# Altium PCB PCB.PcbDoc
Units mil, origin at the board's own origin, x right, y up, seen from the top; angles counter-clockwise.
Board outline 3346.46 x 2962.27 mil, 2 copper layers (Top Layer, Bottom Layer); 3 components, 19 nets, 54 pads, 10 vias.
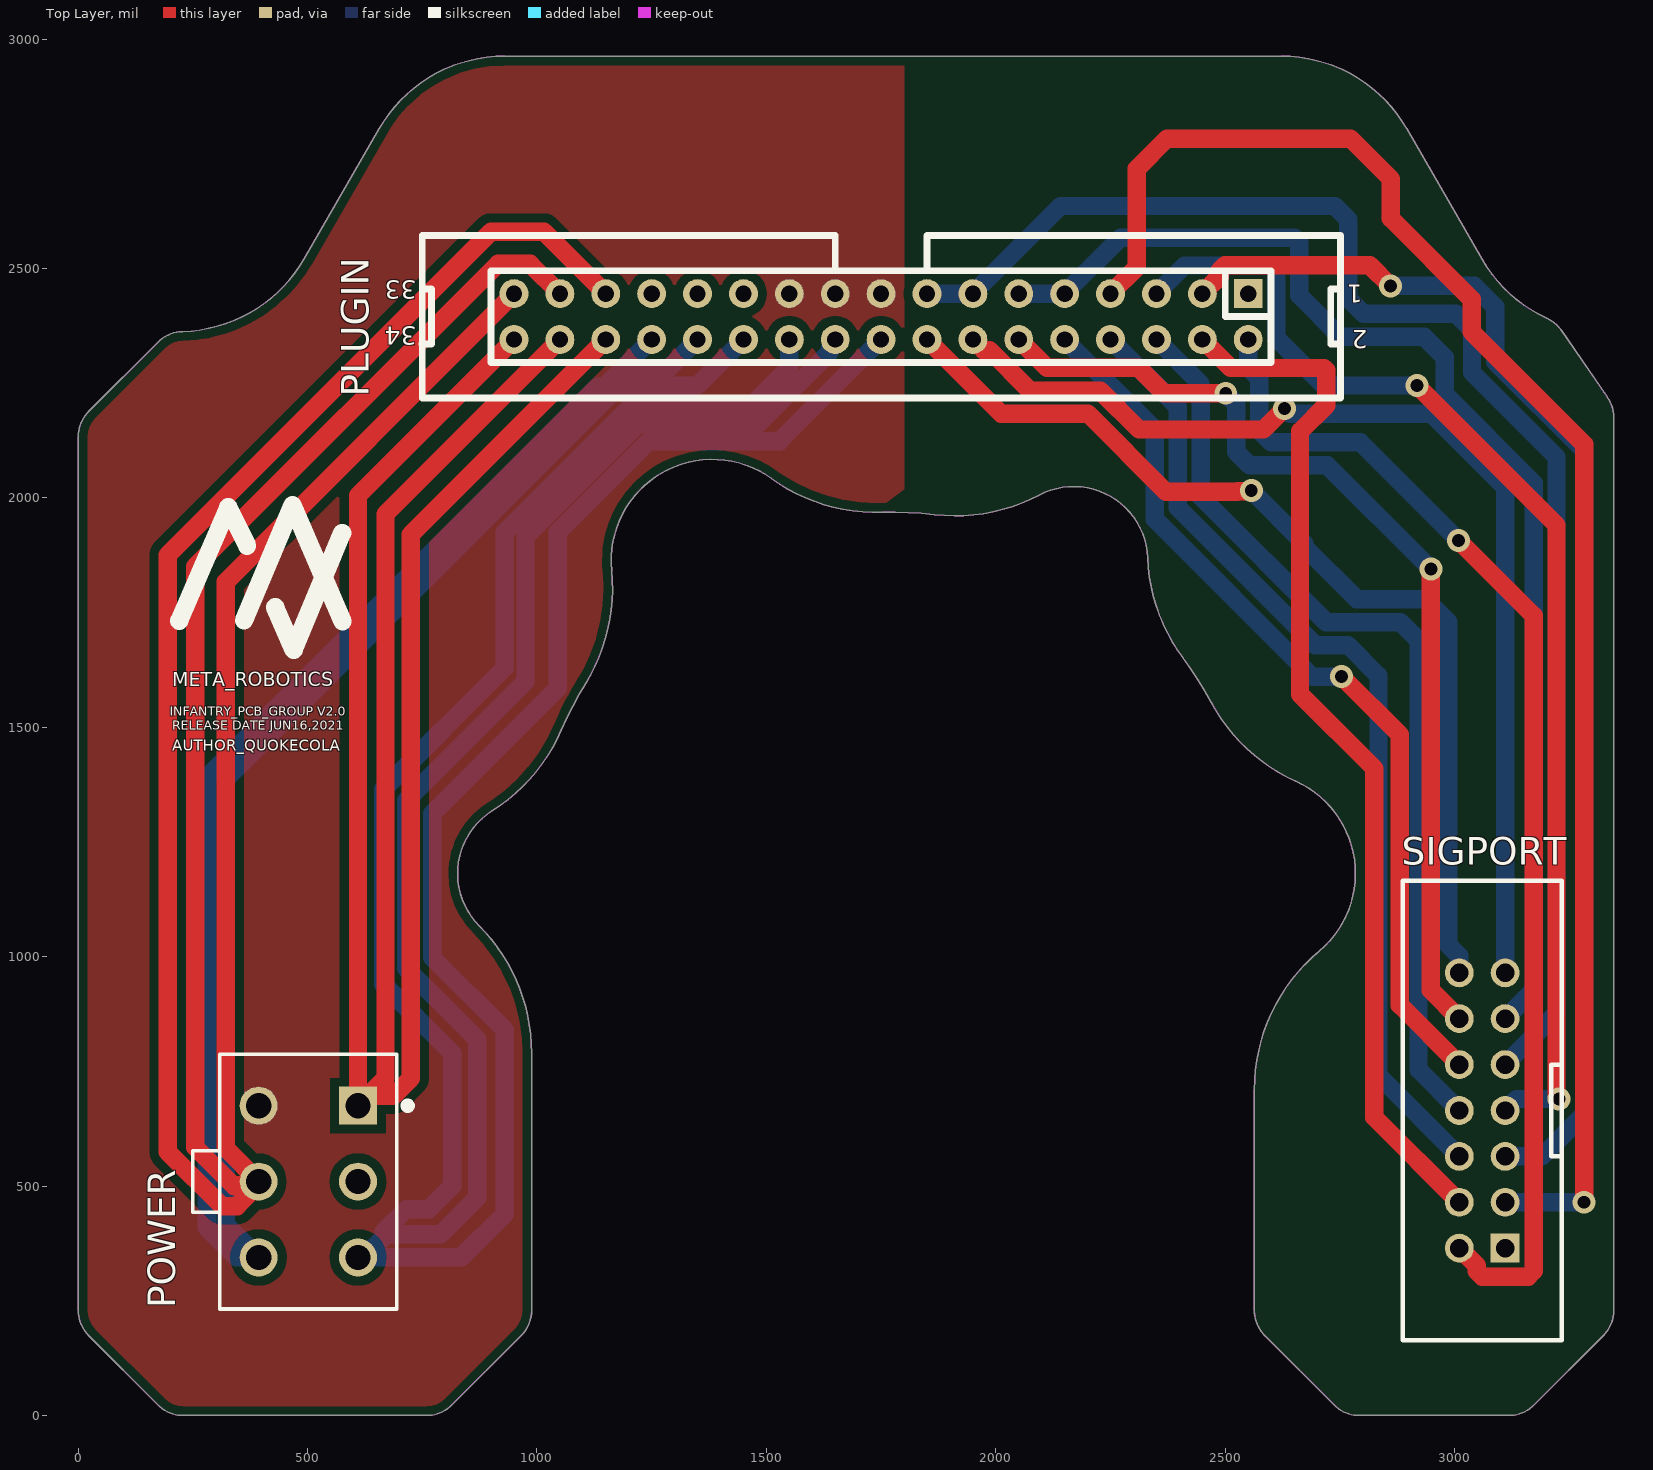
[diagram p0: Top Layer view]
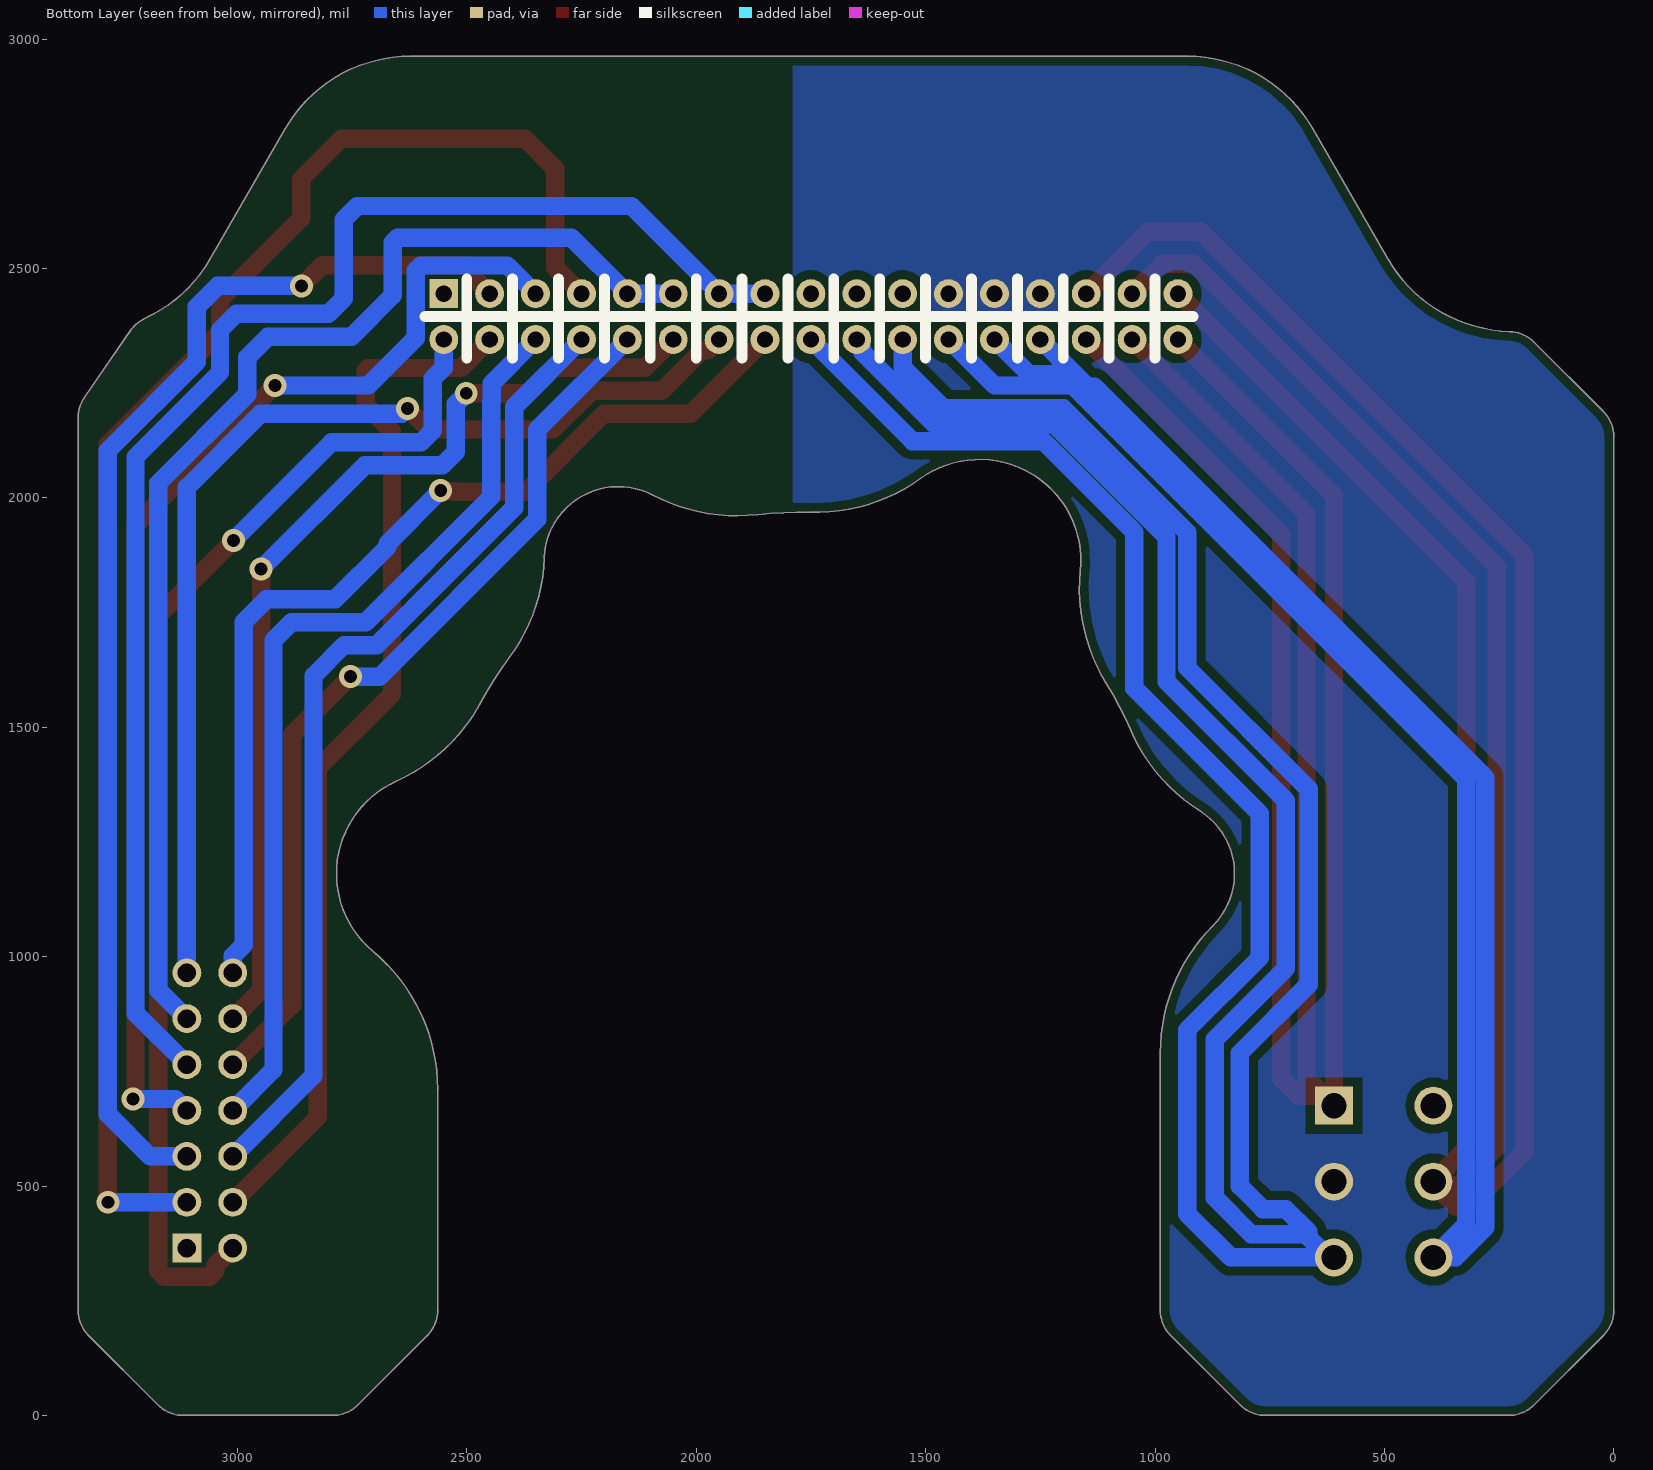
[diagram p1: Bottom Layer view, seen from below]
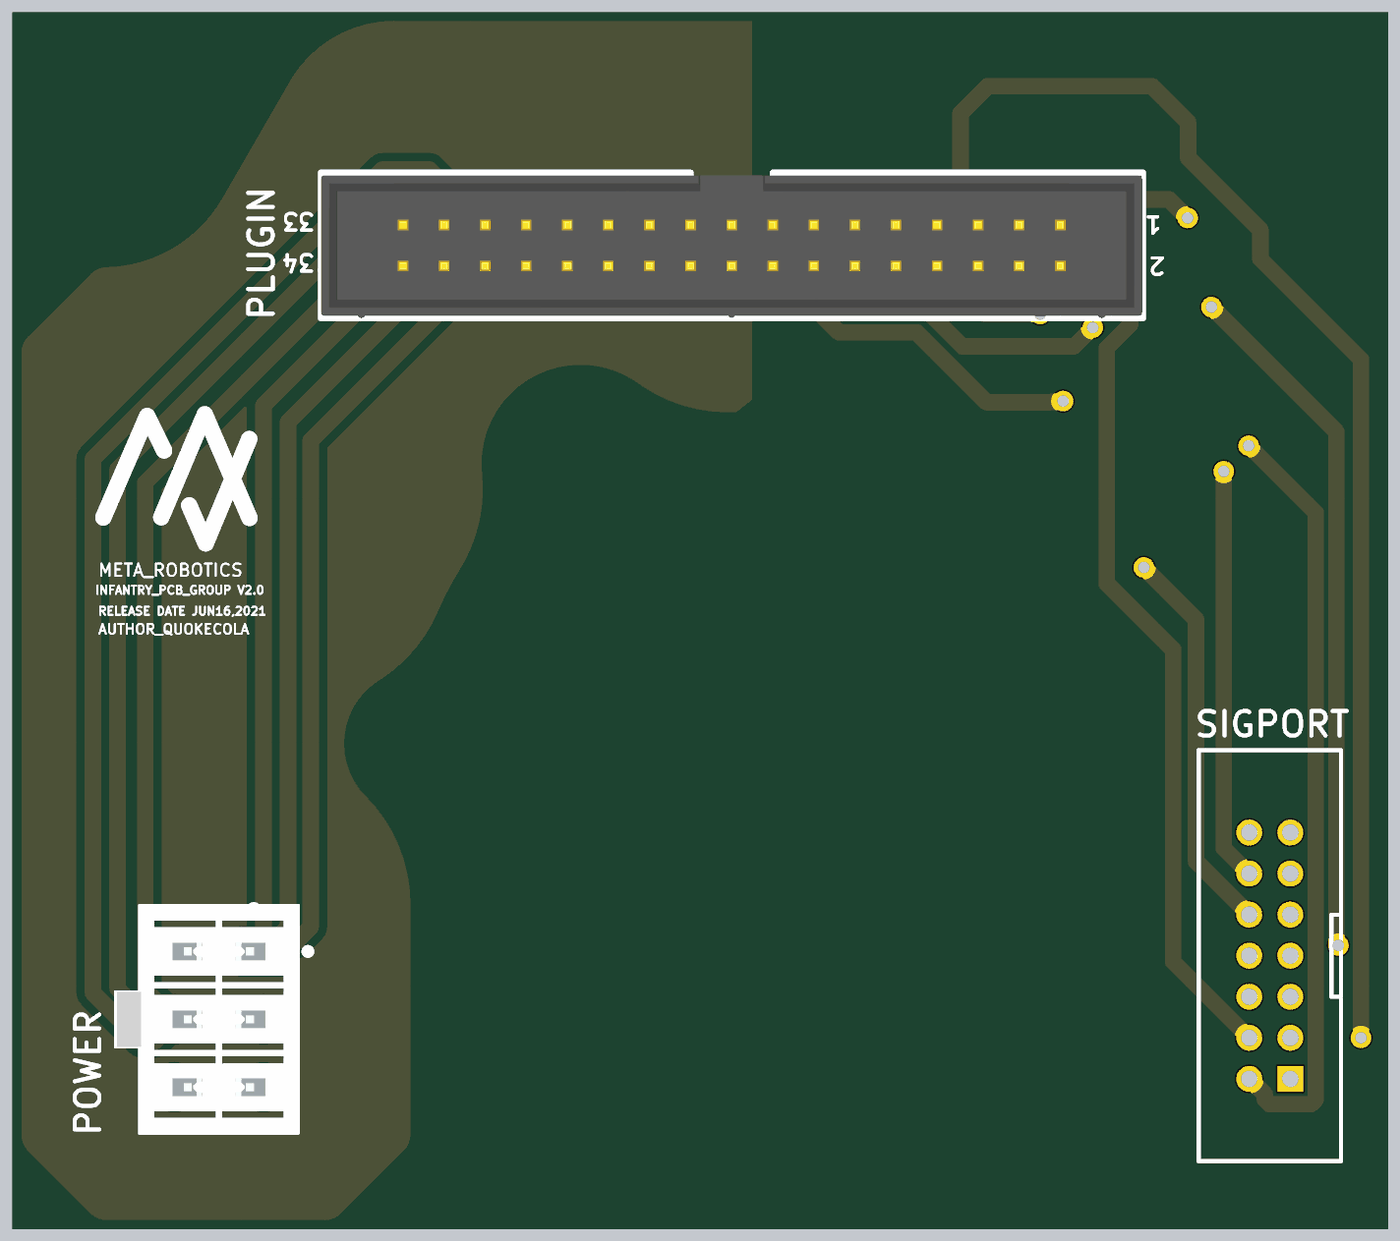
[diagram p2: 3D render of the assembled board from above, using the file's embedded part models]

## Layer stack, top to bottom
Top Solder: solder mask 0.4, Solder Resist, Dk 3.5
Top Layer: signal copper 1.4
Dielectric 1: dielectric 12.6, FR-4, Dk 4.8
Bottom Layer: signal copper 1.4
Bottom Solder: solder mask 0.4, Solder Resist, Dk 3.5

## Board outline
174.04,23.31 ccw(c229.72,78.99) 229.72,0.25 758.97,0.25 ccw(c758.97,78.99) 814.65,23.31 965.38,174.04 ccw(c909.7,229.72) 988.44,229.72 988.44,790 ccw(c594.74,790) 873.96,1067.56 cw(c988.44,1181.35) 902.24,1317.83 ccw(c691.99,1650.69) 1053.28,1494.24 cw(c1775.84,1181.35) 1105.96,1595.19 ccw(c771.02,1802.11) 1162.76,1841.31 cw(c1382.14,1863.26) 1510.84,2042.27 ccw(c1740.66,2361.93) 1752.39,1968.4 cw(c1775.84,1181.35) 1866.15,1963.56 ccw(c1911.31,2354.66) 2094.45,2006.15 cw(c2169.54,1863.26) 2330.83,1869.68 ccw(c2724.22,1885.33) 2408.09,1650.67 cw(c1775.84,1181.35) 2469.17,1554.57 ccw(c2815.84,1741.18) 2653.92,1382.31 cw(c2563.24,1181.35) 2704.57,1012.14 ccw(c2956.94,709.96) 2563.24,709.96 2563.24,229.72 ccw(c2641.98,229.72) 2586.3,174.04 2737.03,23.31 ccw(c2792.71,78.99) 2792.71,0.25 3117.24,0.25 ccw(c3117.24,78.99) 3172.92,23.31 3323.64,174.04 ccw(c3267.97,229.72) 3346.71,229.72 3346.71,2174.81 ccw(c3267.97,2174.81) 3332.82,2219.47 3233.15,2364.24 ccw(c3168.29,2319.59) 3201.13,2391.16 cw(c3332.49,2677.42) 3059.73,2519.94 2895.12,2805.04 ccw(c2622.36,2647.56) 2622.36,2962.52 929.32,2962.52 ccw(c929.32,2647.56) 656.56,2805.04 491.95,2519.94 cw(c219.19,2677.42) 227.73,2362.57 ccw(c229.86,2283.86) 174.18,2339.54 23.31,2188.67 ccw(c78.99,2132.99) 0.25,2132.99 0.25,229.72 ccw(c78.99,229.72) 23.31,174.04

## Design rules (kind name [scope] priority, off if disabled: settings)
BoardOutlineClearance [All] p1: gap=20 ignorepadtopadclearanceinfootprint=FALSE
Clearance Clearance_1 [InPolygon] p1: gap=20 ignorepadtopadclearanceinfootprint=FALSE
Clearance [All] p2: gap=10 ignorepadtopadclearanceinfootprint=FALSE except(0: Arc-Hole Track-Hole SMDPad-Hole THPad-Hole Via-Hole Fill-Hole Poly-Hole Region-Hole Text-Hole)
PlaneConnect [All] p1: planeconnectstyle=Direct reliefexpansion=20 reliefentries=4 reliefconductorwidth=10 reliefairgap=10
PolygonConnect [All] p1: connectstyle=Direct reliefconductorwidth=10 reliefentries=4 polygonreliefangle="90 Angle" airgapwidth=10
RoutingVias [All] p1: holewidth=28 width=50 viastyle="Through Hole" minholewidth=28 minwidth=50 maxholewidth=28 maxwidth=50
SolderMaskExpansion [All] p1: expansion=4 istentingtop=FALSE
Width [All] p1: maxlimit=40 minlimit=10 preferedwidth=40 minimp=50.000000 maximp=50.000000 favimp=50.000000
29 further rules are at their usual default settings.

## Components (designator, comment, footprint, x,y, rotation, side; value= is the part's Value field where it differs from the comment)
PLUGIN "Header 2X11" IDC2.54-LI-2x17P 2550,2445 r180 top
POWER "64900621122" 64900621122 501.73,510 r90 top
SIGPORT "XH2.54 14PIN" DC-2.54-L-Z-14P 3060,665 r90 top

## Footprints (in the part's own frame and the unit in brackets; to place one, negate y for a bottom-side part, rotate by r counter-clockwise, add the part's x,y. Pads: shape width x height; smd on the part's side, far side on the other; paste and mask are expansions set on the pad)
64900621122 [mm] "4.20mm Male Dual Row Vertical Header, 6p"
  rect 2.1x2.1 hole 1.4: 1(4.2,-2.75)
  round 2.1 hole 1.4: 2(0,-2.75) 3(-4.2,-2.75) 4(4.2,2.75) 5(0,2.75) 6(-4.2,2.75)
  silkscreen extent -7.05,-5.7 7.05,6.4, body extent -6.95,-4.8 7.25,6.3, height 12.82
DC-2.54-L-Z-14P [mm] "立式直插简牛插座，间距2.54 淘宝ID:黄晶宝石   店铺网址:https://shop463601444.taobao.com"
  rect 1.6x1.6 hole 1.02: 1(-7.62,-1.27)
  round 1.6 hole 1.02: 2(-7.62,1.27) 3(-5.08,-1.27) 4(-5.08,1.27) 5(-2.54,-1.27) 6(-2.54,1.27) 7(0,-1.27) 8(0,1.27) 9(2.54,-1.27) 10(2.54,1.27) 11(5.08,-1.27) 12(5.08,1.27) 13(7.62,-1.27) 14(7.62,1.27)
  silkscreen extent -12.71,-4.4 12.71,4.4, body extent -12.72,-4.4 12.71,4.7, height 8.8
IDC2.54-LI-2x17P [mm] "34P简易牛角座"
  rect 1.6x1.6 hole 0.9: 1(0,0)
  round 1.6 hole 0.9: 2(0,2.54) 3(2.54,0) 4(2.54,2.54) 5(5.08,0) 6(5.08,2.54) 7(7.62,0) 8(7.62,2.54) 9(10.16,0) 10(10.16,2.54) 11(12.7,0) 12(12.7,2.54) 13(15.24,0) 14(15.24,2.54) 15(17.78,0) 16(17.78,2.54) 17(20.32,0) 18(20.32,2.54) 19(22.86,0) 20(22.86,2.54) 21(25.4,0) 22(25.4,2.54) 23(27.94,0) 24(27.94,2.54) 25(30.48,0) 26(30.48,2.54) 27(33.02,0) 28(33.02,2.54) 29(35.56,0) 30(35.56,2.54) 31(38.1,0) 32(38.1,2.54) 33(40.64,0) 34(40.64,2.54)
  silkscreen extent -5.11,-3.23 45.75,5.77, body extent -5.08,-3.08 45.72,5.77, height 9.17

## Part data
PLUGIN: library part "Header 17X2", "17*2P接插件", BOM名称=17*2P接插件, 学习资源=https://shop463601444.taobao.com, 版权归属="封装库来自淘宝 ID：黄晶宝石"
POWER: library part CMP-1502-00495-1, "THT Male Header WR-MPC4, Vertical, Dual Row, pitch 4.2 mm, 6 pins", Contact Resistance=10mOhm, Manufacturer="Wurth Elektronik", Operating Temperature=-40to105degC, Working Voltage=600VAC, Datasheet URL=https://katalog.we-online.de/em/datasheet/6490xx21122.pdf, Gender=Male, Manufacturer URL=http://www.we-online.de, Mounting Technology=THT, Orientation=Vertical, Package Reference=64900621122, Packaging=Tray, Part Number=64900621122, Pin Number=6, Pitch=4.2mm, Publisher=WurthElektronik

## Via types
v1: diameter 50, hole 28, Top Layer to Bottom Layer, 10 vias

## Nets (pads, with @x,y where several pads share a name; then routed paths per layer and width w, separated by ;. In a path a pad name is that pad's centre, name@x,y a point inside that pad or via, vN(x,y) a via of type N, cw(c..) or ccw(c..) an arc to the next point about the centre after c; other vN are vias at no path point)
AMMO_DC: PLUGIN.29 PLUGIN.31 PLUGIN.33 POWER.5 | length 7639.2
  Top Layer w40: PLUGIN.33 322.13,1817.13 322.13,581.98 393.46,510.64 POWER.5 ; PLUGIN.31 985,2510 915,2510 255,1850 255,585 340,500 341.83,501.83 385.3,501.83 POWER.5 ; PLUGIN.29 1015,2580 900,2580 195,1875 195,575 313.43,456.57 346.57,456.57 393.46,503.46 POWER.5
AMMO_GND: PLUGIN.23 PLUGIN.25 PLUGIN.27 POWER.2
CAN2_H: PLUGIN.9 PLUGIN.11 SIGPORT.11 | length 2701.6
  Bottom Layer w40: PLUGIN.11 PLUGIN.9 2272,2567 2650.99,2567 2661.5,2556.5 2661.5,2440.96 2751.67,2350.78 2933.67,2350.78 2978.22,2306.22 2978.22,2225.92 3172,2032.15 3172,927 SIGPORT.11
CAN2_L: PLUGIN.13 PLUGIN.15 SIGPORT.9 | length 3203
  Bottom Layer w40: PLUGIN.15 PLUGIN.13 2141,2636 2738.65,2636 2768.16,2606.5 2768.16,2434.79 2801.92,2401.03 3002.66,2401.03 3037.84,2365.84 3037.84,2273.16 3222,2089 3222,877 SIGPORT.9
GMB_DC: PLUGIN.17 PLUGIN.19 PLUGIN.21 POWER.4
GMB_GND: PLUGIN.30 PLUGIN.32 PLUGIN.34 POWER.1 | length 5557.9
  Top Layer w40: PLUGIN.34 610,2005 POWER.1 POWER.1@631.34,696.69 ; PLUGIN.32 670,1965 670,735.35 POWER.1@631.34,696.69 ; PLUGIN.30 725,1920 725,735 686.69,696.69 POWER.1@631.34,696.69
MPC_DC: PLUGIN.24 PLUGIN.26 PLUGIN.28 POWER.6 | length 5289.3
  Bottom Layer w40: PLUGIN.28 1175,2270 ; PLUGIN.26 1275,2270 1175,2270 ; PLUGIN.24 1350,2245 1179.29,2245 322.13,1387.84 322.13,416.62 393.46,345.28 POWER.6 393.11,345 345,345 280,410 280,1390 1132.5,2242.5 1147.5,2242.5 1175,2270
MPC_GND: PLUGIN.18 PLUGIN.20 PLUGIN.22 POWER.3 | length 8294.1
  Bottom Layer w40: POWER.3 621.55,344.65 POWER.3@621.9,345 ; 666.13,400.77 715.35,450 765,450 815,500 815,790 665,940 665,1365 930,1630 930,1925 1200,2195 1460,2195 1550,2285 PLUGIN.22 ; PLUGIN.20 1650,2338.78 1638.5,2327.28 1638.5,2318.5 1480,2160 1220,2160 975,1915 975,1600 715,1340 715,975 870,820 870,475 790,395 671.9,395 POWER.3@621.9,345 ; PLUGIN.18 1528.73,2123.73 1243.73,2123.73 1045,1925 1045,1585 771.57,1311.57 771.57,998.43 930,840 930,440 835,345 POWER.3@621.9,345
REFEREE_A1: PLUGIN.8 SIGPORT.6 | length 2136.5
  Bottom Layer w40: PLUGIN.8 2396.35,2198.65 2396.35,1978.65 2696,1679 2767.18,1679 2834,1612.18 2834,741 SIGPORT.6
REFEREE_A2: PLUGIN.4 SIGPORT.4 | length 2278.1
  Top Layer w40: PLUGIN.4 2512,2283 2715,2283 2720,2278 2720,2202 2663,2145 2663,1572 2825,1410 2825,650 SIGPORT.4
REFEREE_A3: PLUGIN.6 SIGPORT.8 | length 2048.2
  Bottom Layer w40: PLUGIN.6 2445.58,2249.42 2445.58,2210.7 2446.35,2209.93 2446.35,2002.65 2720,1729 2881.82,1729 2921,1689.82 2921,754 SIGPORT.8
REFEREE_A4: PLUGIN.2 SIGPORT.2 | length 2601.3
  Top Layer w40: v1(3008.5,1907.15) 3172,1743.65 3172,315 3160,303 3060,303 3048,315 3048,327 SIGPORT.2
  Bottom Layer w40: PLUGIN.2 2550,2283.84 2574,2259.84 2574,2147 2600,2121 2794.65,2121 v1(3008.5,1907.15)
REFEREE_B1: PLUGIN.16 SIGPORT.14 | length 2172.1
  Top Layer w40: PLUGIN.16 2011.5,2183.5 2200.5,2183.5 2371,2013 2526,2013 2527.09,2014.09 2554.87,2014.09 v1(2556.78,2016)
  Bottom Layer w40: v1(2556.78,2016) 2672.7,1900.08 2672.7,1893.01 2786.71,1779 2936.66,1779 2986,1729.66 2986,1026 3010,1002 SIGPORT.14
REFEREE_B2: PLUGIN.12 SIGPORT.12 | length 2172.3
  Top Layer w40: PLUGIN.12 2111.5,2283.5 2311.25,2283.5 2366.75,2228 v1(2501,2228) ; v1(2948,1845) 2948,927 SIGPORT.12
  Bottom Layer w40: v1(2501,2228) 2524,2205 2524,2100 2553,2071 2722,2071 v1(2948,1845)
REFEREE_B3: PLUGIN.14 SIGPORT.13 | length 2389.5
  Top Layer w40: PLUGIN.14 1973,2322 1986.03,2322 2074.53,2233.5 2227.5,2233.5 2312,2149 2583,2149 v1(2629,2195)
  Bottom Layer w40: v1(2629,2195) 2640.98,2183.02 2949.98,2183.02 3110,2023 SIGPORT.13
REFEREE_B4: PLUGIN.10 SIGPORT.10 | length 1975.6
  Top Layer w40: v1(2753.46,1610.71) 2880.49,1483.69 2880.49,894.51 SIGPORT.10
  Bottom Layer w40: PLUGIN.10 2346.35,2148.65 2346.35,1953.65 2690,1610 v1@2755,1610
UART_GND: PLUGIN.7 SIGPORT.3 | length 3489.8
  Top Layer w40: PLUGIN.7 2307,2502 2307,2717 2373,2783 2773,2783 2861,2695 2861,2609 3037,2433 3037,2362 3282,2117 v1(3282,465)
  Bottom Layer w40: SIGPORT.3 v1(3282,465)
UART_RX: PLUGIN.3 SIGPORT.5 | length 2758.5
  Top Layer w40: PLUGIN.3 2488,2483 2488,2495 2500,2507 2815,2507 v1(2860,2462)
  Bottom Layer w40: v1(2860,2462) 3042.71,2462 3088.36,2416.36 3088.36,2296.64 3282,2103 3282,656.64 3190.36,565 SIGPORT.5
UART_Tx: PLUGIN.5 SIGPORT.7 | length 2598.2
  Top Layer w40: v1(2918,2245) 3222,1941 3222,695 v1(3227,690)
  Bottom Layer w40: PLUGIN.5 2411.5,2506.5 2600,2506.5 2611.5,2495 2611.5,2348 2714.5,2245 v1(2918,2245) ; SIGPORT.7 3135,690 v1(3227,690)
pads on no net: PLUGIN.1 SIGPORT.1

## Polygon pours and split planes (outlines as drawn)
GMB_DC on Top Layer "AMMO_GND_Poly" (solid, pour order 0): 455,3000 0.25,2545.25 0.25,197.1 197.1,0.25 791.59,0.25 988.44,197.1 988.44,941.56 840,1090 840,1269.2 1800,2019.2 1800,3000
AMMO_GND on Bottom Layer "AMMO_GND_Poly" (solid, pour order 1): 1805,2980 1790,2965 1790,325 1745,325 1420,0 0,0 0,2975

## Keep-outs
Keep-Out Layer:
  the board outline again, w0.5

## Silkscreen, mask and mechanical layers (free items; w line width, h text height)
Top Overlay:
  lines w40: 220.34,1732.42 327.15,1979.39 368.19,1895.63 ; 361.43,1732.91 467.28,1983.6 576.11,1731.32 ; 429.35,1761.74 469.6,1669.3 575.53,1923.44
  text "META_ROBOTICS" at 205,1590 h30
  text "INFANTRY_PCB_GROUP V2.0" at 200,1525 h20
  text "RELEASE DATE JUN16,2021" at 205,1495 h20
  text "AUTHOR_QUOKECOLA" at 205,1449 h24
Mechanical 1:
  the board outline again, w0.5

## Text inside footprints (layer, text, board x,y; h text height)
PLUGIN: Top Overlay "2" at 2810,2365 h40 r180; Top Overlay "1" at 2800,2465 h40 r180; Top Overlay "34" at 738,2373 h40 r180; Top Overlay "33" at 738,2473 h40 r180